# Altium PCB Board.PcbDoc (part 2 of 3)
Units mm, origin at the board's own origin, x right, y up, seen from the top; angles counter-clockwise.
Board outline 220 x 125 mm, 2 copper layers (Top Layer, Bottom Layer); 325 components, 197 nets, 1030 pads, 170 vias.
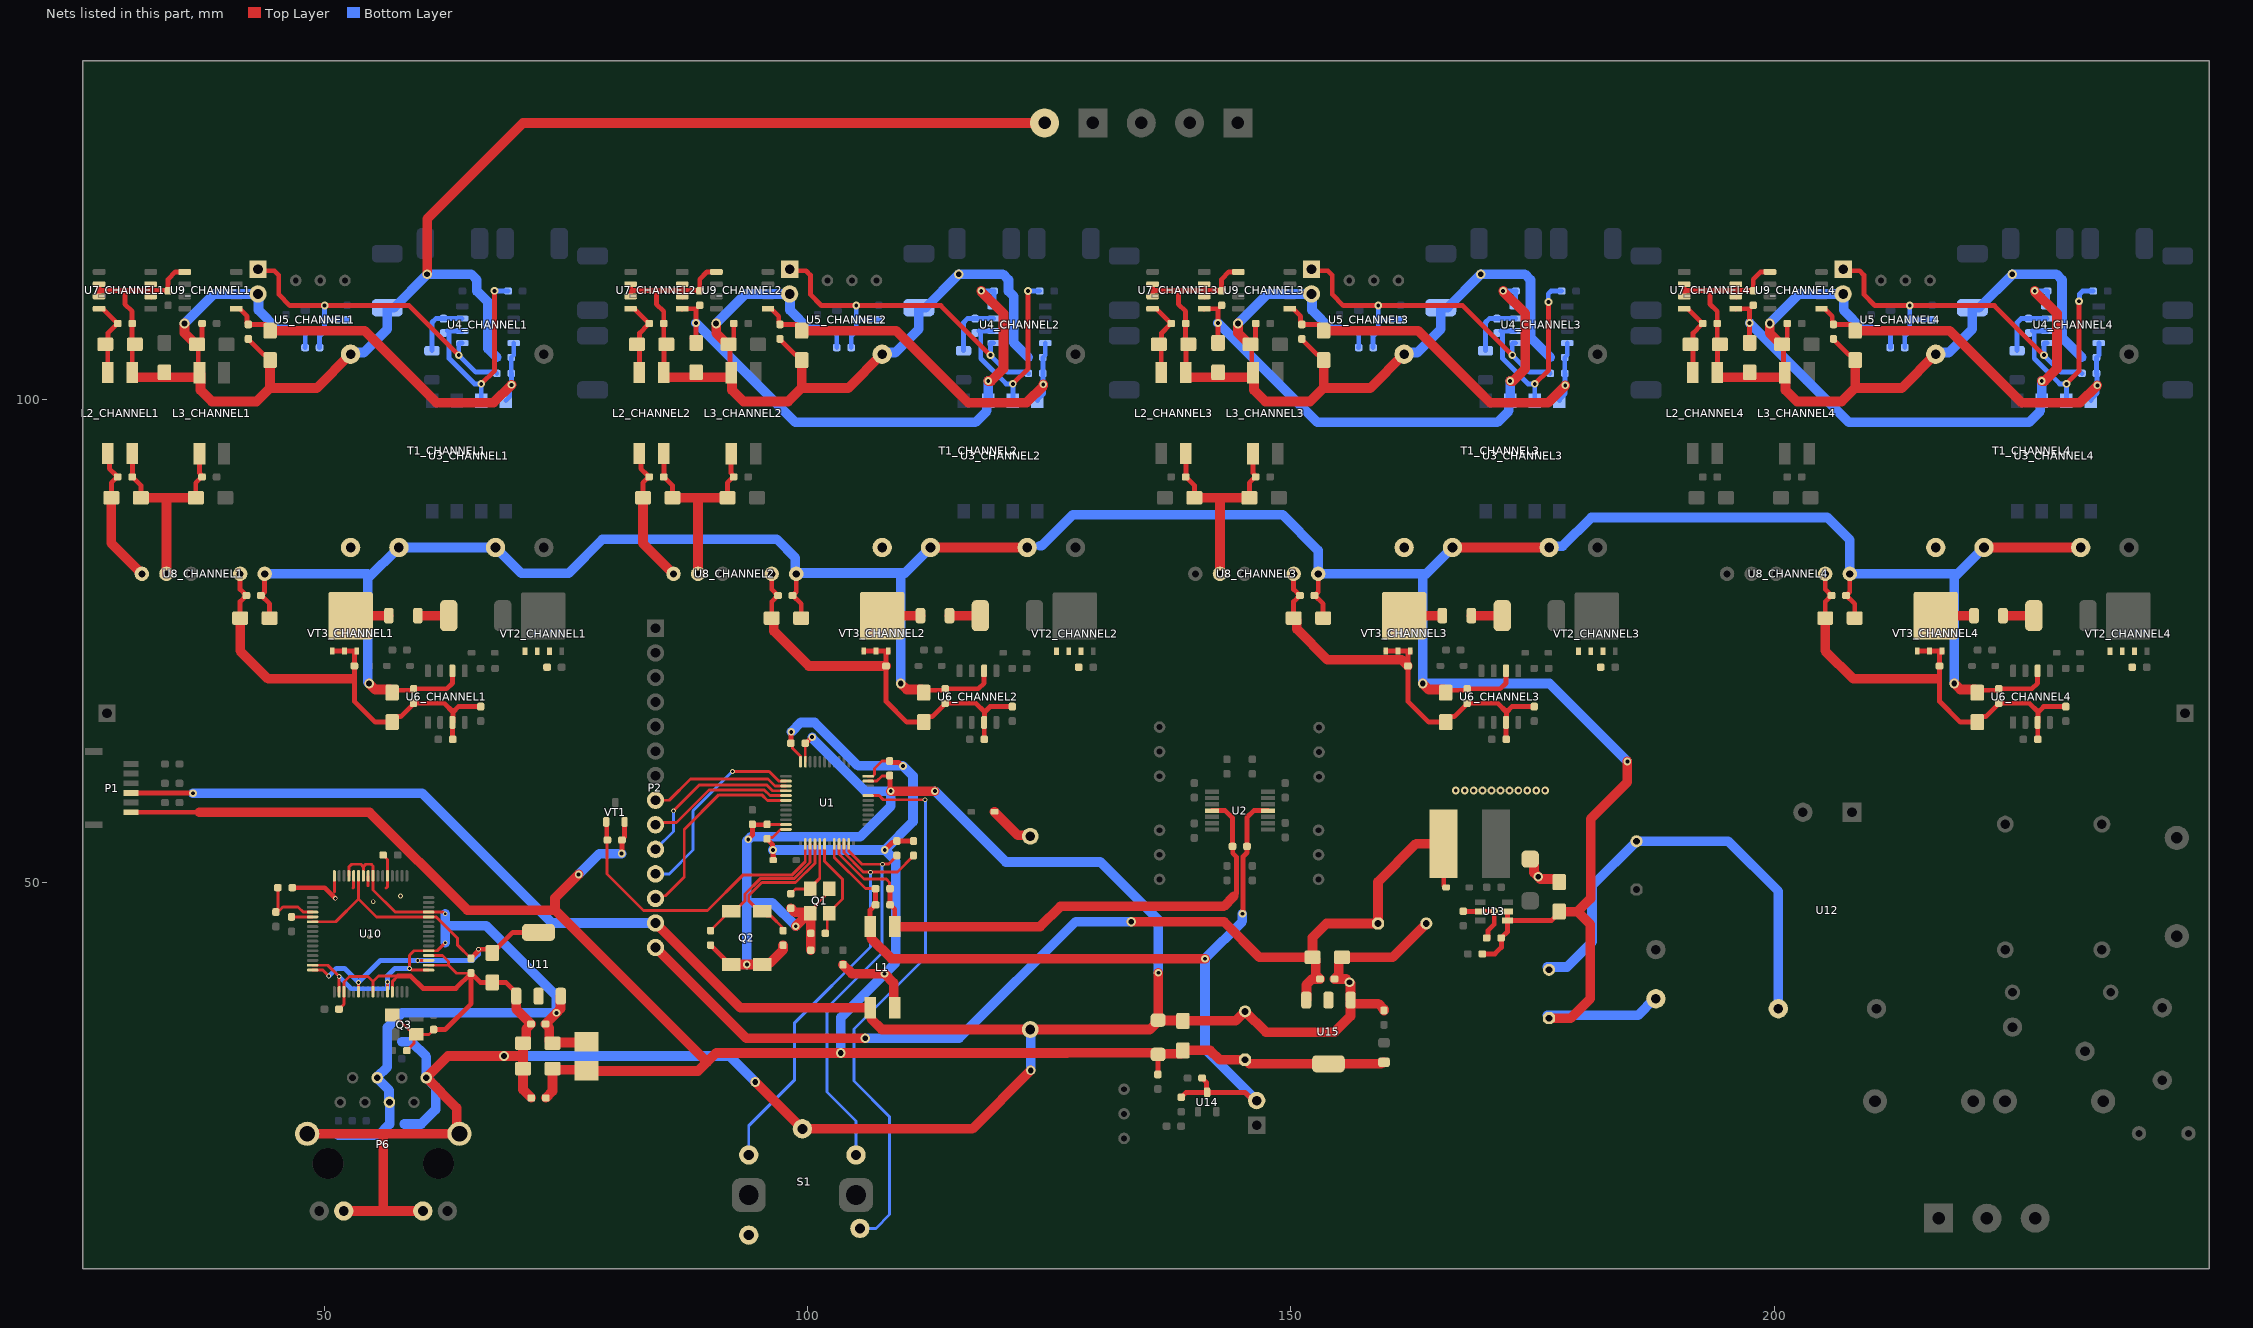
[diagram p2: the nets of this part, all layers, seen from the top]

## Via types
v1: diameter 0.8, hole 0.4, Top Layer to Bottom Layer, 99 vias
v2: diameter 0.5, hole 0.3, Top Layer to Bottom Layer, 49 vias
v3: diameter 1, hole 0.6, Top Layer to Bottom Layer, 22 vias

## Nets (pads, with @x,y where several pads share a name; then routed paths per layer and width w, separated by ;. In a path a pad name is that pad's centre, name@x,y a point inside that pad or via, vN(x,y) a via of type N, cw(c..) or ccw(c..) an arc to the next point about the centre after c; other vN are vias at no path point) (continued)
(+8V)_CHANNEL2: C13_CHANNEL2.2 C22_CHANNEL2.2 C23_CHANNEL2.1 U3_CHANNEL2.2 U4_CHANNEL2.8 U7_CHANNEL2.1 | length 57.7
  Top Layer w0.5: U7_CHANNEL2.1@87.01,109.337 U7_CHANNEL2.1@87.02,109.347 88.497,109.347 88.45,109.3 v1(88.45,107.875) C23_CHANNEL2.1@88.45,105.825 C23_CHANNEL2.1@88.021,106.254
  Top Layer w1: v1(117.95,111.2) 117.95,111.15 120.25,108.85 120.25,103.15 118.975,101.875 v1(118.675,101.875)
  Bottom Layer w0.5: v1(117.95,111.2) 117.964,111.186 119.26,111.186 C13_CHANNEL2.2@119.274,111.172 119.262,111.16 119.262,109.609 U4_CHANNEL2.8@119.25,109.597
  Bottom Layer w1: v1(88.45,107.875) 98.725,97.6 117.35,97.6 118.535,98.785 118.535,99.689 U3_CHANNEL2.2@118.685,99.839 118.685,101.865 v1(118.675,101.875)
(+8V)_CHANNEL3: C13_CHANNEL3.2 C22_CHANNEL3.2 C23_CHANNEL3.1 U3_CHANNEL3.2 U4_CHANNEL3.8 U7_CHANNEL3.1 | length 57.7
  Top Layer w0.5: U7_CHANNEL3.1@141.01,109.337 U7_CHANNEL3.1@141.02,109.347 142.497,109.347 142.45,109.3 v1(142.45,107.875) C23_CHANNEL3.1@142.45,105.825 C23_CHANNEL3.1@142.021,106.254
  Top Layer w1: v1(171.95,111.2) 171.95,111.15 174.25,108.85 174.25,103.15 172.975,101.875 v1(172.675,101.875)
  Bottom Layer w0.5: v1(171.95,111.2) 171.964,111.186 173.26,111.186 C13_CHANNEL3.2@173.274,111.172 173.262,111.16 173.262,109.609 U4_CHANNEL3.8@173.25,109.597
  Bottom Layer w1: v1(142.45,107.875) 152.725,97.6 171.35,97.6 172.535,98.785 172.535,99.689 U3_CHANNEL3.2@172.685,99.839 172.685,101.865 v1(172.675,101.875)
(+8V)_CHANNEL4: C13_CHANNEL4.2 C22_CHANNEL4.2 C23_CHANNEL4.1 U3_CHANNEL4.2 U4_CHANNEL4.8 U7_CHANNEL4.1 | length 57.7
  Top Layer w0.5: U7_CHANNEL4.1@196.01,109.337 U7_CHANNEL4.1@196.02,109.347 197.497,109.347 197.45,109.3 v1(197.45,107.875) C23_CHANNEL4.1@197.45,105.825 C23_CHANNEL4.1@197.021,106.254
  Top Layer w1: v1(226.95,111.2) 226.95,111.15 229.25,108.85 229.25,103.15 227.975,101.875 v1(227.675,101.875)
  Bottom Layer w0.5: v1(226.95,111.2) 226.964,111.186 228.26,111.186 C13_CHANNEL4.2@228.274,111.172 228.262,111.16 228.262,109.609 U4_CHANNEL4.8@228.25,109.597
  Bottom Layer w1: v1(197.45,107.875) 207.725,97.6 226.35,97.6 227.535,98.785 227.535,99.689 U3_CHANNEL4.2@227.685,99.839 227.685,101.865 v1(227.675,101.875)
(-8V)_CHANNEL1: C14_CHANNEL1.1 C32_CHANNEL1.1 C33_CHANNEL1.2 R22_CHANNEL1.2 U3_CHANNEL1.4 U4_CHANNEL1.4 U9_CHANNEL1.1 | length 39.7
  Top Layer w0.5: U9_CHANNEL1.1@40.886,109.347 41.216,109.347 42,108.563 42,107.85 C32_CHANNEL1.1@42.125,107.725 43.85,107.725 44.375,107.2 C33_CHANNEL1.2@44.375,107.075
  Top Layer w1: C33_CHANNEL1.2@44.375,107.075 54.15,107.075 61.6,99.625 67.5,99.625 v1(69.35,101.475)
  Bottom Layer w0.5: U3_CHANNEL1.4@68.765,99.839 69.165,100.239 69.165,101.209 69.35,101.394 v1(69.35,101.475) 69.34,101.485 69.34,102.653 R22_CHANNEL1.2@69.33,102.663 C14_CHANNEL1.1@69.33,104.314 ; C14_CHANNEL1.1@69.584,104.543 U4_CHANNEL1.4@69.584,105.787
(-8V)_CHANNEL2: C14_CHANNEL2.1 C32_CHANNEL2.1 C33_CHANNEL2.2 R22_CHANNEL2.2 U3_CHANNEL2.4 U4_CHANNEL2.4 U9_CHANNEL2.1 | length 39.9
  Top Layer w0.5: U9_CHANNEL2.1@95.886,109.347 96.216,109.347 97,108.563 97,107.85 C32_CHANNEL2.1@97.125,107.725 98.85,107.725 99.375,107.2 C33_CHANNEL2.2@99.375,107.075
  Top Layer w1: C33_CHANNEL2.2@99.375,107.075 109.15,107.075 116.6,99.625 122.63,99.625 124.375,101.37 v1(124.375,101.525)
  Bottom Layer w0.5: U3_CHANNEL2.4@123.765,99.839 123.765,99.939 124.4,100.574 124.4,100.85 124.412,100.862 124.412,101.488 124.353,101.547 124.353,102.641 R22_CHANNEL2.2@124.33,102.663 C14_CHANNEL2.1@124.33,104.314 ; C14_CHANNEL2.1@124.584,104.543 U4_CHANNEL2.4@124.584,105.787
(-8V)_CHANNEL3: C14_CHANNEL3.1 C32_CHANNEL3.1 C33_CHANNEL3.2 R22_CHANNEL3.2 U3_CHANNEL3.4 U4_CHANNEL3.4 U9_CHANNEL3.1 | length 39.8
  Top Layer w0.5: U9_CHANNEL3.1@149.886,109.347 150.216,109.347 151,108.563 151,107.85 C32_CHANNEL3.1@151.125,107.725 152.85,107.725 153.375,107.2 C33_CHANNEL3.2@153.375,107.075
  Top Layer w1: C33_CHANNEL3.2@153.375,107.075 163.15,107.075 170.6,99.625 176.63,99.625 178.375,101.37 v1(178.375,101.425)
  Bottom Layer w0.5: U3_CHANNEL3.4@177.765,99.839 177.765,99.939 178.375,100.549 v1(178.375,101.425) 178.353,101.447 178.353,102.641 R22_CHANNEL3.2@178.33,102.663 C14_CHANNEL3.1@178.33,104.314 ; C14_CHANNEL3.1@178.584,104.543 U4_CHANNEL3.4@178.584,105.787
(-8V)_CHANNEL4: C14_CHANNEL4.1 C32_CHANNEL4.1 C33_CHANNEL4.2 R22_CHANNEL4.2 U3_CHANNEL4.4 U4_CHANNEL4.4 U9_CHANNEL4.1 | length 39.8
  Top Layer w0.5: U9_CHANNEL4.1@204.886,109.347 205.216,109.347 206,108.563 206,107.85 C32_CHANNEL4.1@206.125,107.725 207.85,107.725 208.375,107.2 C33_CHANNEL4.2@208.375,107.075
  Top Layer w1: C33_CHANNEL4.2@208.375,107.075 218.15,107.075 225.6,99.625 231.63,99.625 233.425,101.42 v1(233.425,101.425)
  Bottom Layer w0.5: U3_CHANNEL4.4@232.765,99.839 232.765,99.939 233.425,100.599 v1(233.425,101.425) 233.378,101.472 233.378,102.616 R22_CHANNEL4.2@233.33,102.663 C14_CHANNEL4.1@233.33,104.314 ; C14_CHANNEL4.1@233.584,104.543 U4_CHANNEL4.4@233.584,105.787
(GND)_CHANNEL1: C13_CHANNEL1.1 C14_CHANNEL1.2 C16_CHANNEL1.2 C20_CHANNEL1.1 C21_CHANNEL1.2 C22_CHANNEL1.1 C23_CHANNEL1.2 C30_CHANNEL1.2 C31_CHANNEL1.1 C32_CHANNEL1.2 C33_CHANNEL1.1 L2_CHANNEL1.1 L3_CHANNEL1.2 P3_CHANNEL1.2 P5.2 R21_CHANNEL1.1 R34_CHANNEL1.1 T1_CHANNEL1.1 U5_CHANNEL1.1 U7_CHANNEL1.2 U7_CHANNEL1.3 U7_CHANNEL1.6 U7_CHANNEL1.7 U9_CHANNEL1.5 | length 182.6
  Top Layer w0.5: U7_CHANNEL1.7@26.686,110.617 26.686,111.252 ; U7_CHANNEL1.6@26.686,111.887 26.686,111.252 ; 29.353,111.252 32.02,111.252 ; L2_CHANNEL1.1@30.123,102.761 30.123,105.409 C21_CHANNEL1.2@30.378,105.664 ; C21_CHANNEL1.2@30.373,105.659 30.103,105.929 C20_CHANNEL1.1@30.103,107.823 30.103,109.072 29.35,109.825 29.35,111.252 26.686,111.252 ; U7_CHANNEL1.3@32.02,111.887 32.02,111.252 ; U7_CHANNEL1.2@32.075,110.562 U7_CHANNEL1.2@32.02,110.617 32.02,111.252 ; C22_CHANNEL1.1@33.682,111.252 32.02,111.252 ; C22_CHANNEL1.1@33.825,111.2 33.825,112.4 34.582,113.157 U9_CHANNEL1.5@35.552,113.157 ; C31_CHANNEL1.1@36.754,105.726 37.342,106.314 C30_CHANNEL1.2@37.342,107.823 ; C31_CHANNEL1.1@36.817,105.664 36.945,105.536 36.945,102.862 L3_CHANNEL1.2@37.059,102.748 ; C32_CHANNEL1.2@42.125,106.225 42.125,106.2 43.725,104.6 43.925,104.6 44.375,104.15 C33_CHANNEL1.1@44.375,104.025
  Top Layer w1: L2_CHANNEL1.1@30.123,102.761 30.123,102.375 30.223,102.275 36.972,102.275 37.072,102.375 L3_CHANNEL1.2@37.072,102.735 37.172,102.635 37.172,100.928 38.35,99.75 42.975,99.75 44.375,101.15 ; v3(35.525,107.825) 35.525,106.831 36.692,105.664 C31_CHANNEL1.1@36.817,105.664 ; C33_CHANNEL1.1@44.375,104.025 44.375,101.15 ; T1_CHANNEL1.1@52.705,104.648 49.207,101.15 44.375,101.15 ; v3(60.625,112.925) 60.625,118.65 70.546,128.571 P5.2@124.509,128.571
  Bottom Layer w0.5: R21_CHANNEL1.1@46.025,107.225 46.039,107.239 48.007,107.239 U5_CHANNEL1.1@48.011,107.243 ; C16_CHANNEL1.2@48,105.325 48.011,105.336 U5_CHANNEL1.1@48.011,107.243 ; U5_CHANNEL1.1@48.022,107.254 U5_CHANNEL1.1@48.011,107.243
  Bottom Layer w1: v3(35.525,107.825) 38.58,110.88 43.025,110.88 43.175,110.73 43.175,109.2 45.15,107.225 R21_CHANNEL1.1@46.025,107.225 ; T1_CHANNEL1.1@52.705,104.648 52.876,104.819 54.069,104.819 56.5,107.25 R34_CHANNEL1.1@56.5,109.45 57.2,109.45 60.625,112.875 v3(60.625,112.925) 65.188,112.925 65.774,112.339 C13_CHANNEL1.1@65.774,111.172 66.925,110.021 66.925,105.219 C14_CHANNEL1.2@67.83,104.314
(GND)_CHANNEL2: C13_CHANNEL2.1 C14_CHANNEL2.2 C16_CHANNEL2.2 C20_CHANNEL2.1 C21_CHANNEL2.2 C22_CHANNEL2.1 C23_CHANNEL2.2 C30_CHANNEL2.2 C31_CHANNEL2.1 C32_CHANNEL2.2 C33_CHANNEL2.1 L2_CHANNEL2.1 L3_CHANNEL2.2 P3_CHANNEL2.2 R21_CHANNEL2.1 R34_CHANNEL2.1 T1_CHANNEL2.1 U5_CHANNEL2.1 U7_CHANNEL2.2 U7_CHANNEL2.3 U7_CHANNEL2.6 U7_CHANNEL2.7 U9_CHANNEL2.5 | length 108.8
  Top Layer w0.5: U7_CHANNEL2.7@81.686,110.617 81.686,111.252 ; U7_CHANNEL2.6@81.686,111.887 81.686,111.252 ; 84.353,111.252 87.02,111.252 ; L2_CHANNEL2.1@85.123,102.761 85.123,105.409 C21_CHANNEL2.2@85.378,105.664 ; C21_CHANNEL2.2@85.373,105.659 85.103,105.929 C20_CHANNEL2.1@85.103,107.823 85.103,109.072 84.35,109.825 84.35,111.252 81.686,111.252 ; U7_CHANNEL2.3@87.02,111.887 87.02,111.252 ; U7_CHANNEL2.2@87.075,110.562 U7_CHANNEL2.2@87.02,110.617 87.02,111.252 ; C22_CHANNEL2.1@88.682,111.252 87.02,111.252 ; C22_CHANNEL2.1@88.825,111.2 88.825,112.4 89.582,113.157 U9_CHANNEL2.5@90.552,113.157 ; C31_CHANNEL2.1@91.754,105.726 92.342,106.314 C30_CHANNEL2.2@92.342,107.823 ; C31_CHANNEL2.1@91.817,105.664 91.944,105.536 91.944,102.862 L3_CHANNEL2.2@92.059,102.748 ; C32_CHANNEL2.2@97.125,106.225 97.125,106.2 98.725,104.6 98.925,104.6 99.375,104.15 C33_CHANNEL2.1@99.375,104.025
  Top Layer w1: L2_CHANNEL2.1@85.123,102.761 85.123,102.375 85.223,102.275 91.972,102.275 92.072,102.375 L3_CHANNEL2.2@92.072,102.735 92.172,102.635 92.172,100.928 93.35,99.75 97.975,99.75 99.375,101.15 ; v3(90.525,107.825) 90.525,106.831 91.692,105.664 C31_CHANNEL2.1@91.817,105.664 ; C33_CHANNEL2.1@99.375,104.025 99.375,101.15 ; T1_CHANNEL2.1@107.705,104.648 104.207,101.15 99.375,101.15
  Bottom Layer w0.5: R21_CHANNEL2.1@101.025,107.225 101.039,107.239 103.007,107.239 U5_CHANNEL2.1@103.011,107.243 ; C16_CHANNEL2.2@103,105.325 103.011,105.336 U5_CHANNEL2.1@103.011,107.243 ; U5_CHANNEL2.1@103.022,107.254 U5_CHANNEL2.1@103.011,107.243
  Bottom Layer w1: v3(90.525,107.825) 93.58,110.88 98.025,110.88 98.175,110.73 98.175,109.2 100.15,107.225 R21_CHANNEL2.1@101.025,107.225 ; T1_CHANNEL2.1@107.705,104.648 107.876,104.819 109.069,104.819 111.5,107.25 R34_CHANNEL2.1@111.5,109.45 112.2,109.45 115.625,112.875 v3(115.625,112.925) 120.188,112.925 120.774,112.339 C13_CHANNEL2.1@120.774,111.172 121.3,110.646 121.3,105.844 C14_CHANNEL2.2@122.83,104.314
(GND)_CHANNEL3: C13_CHANNEL3.1 C14_CHANNEL3.2 C16_CHANNEL3.2 C20_CHANNEL3.1 C21_CHANNEL3.2 C22_CHANNEL3.1 C23_CHANNEL3.2 C30_CHANNEL3.2 C31_CHANNEL3.1 C32_CHANNEL3.2 C33_CHANNEL3.1 L2_CHANNEL3.1 L3_CHANNEL3.2 P3_CHANNEL3.2 R21_CHANNEL3.1 R34_CHANNEL3.1 T1_CHANNEL3.1 U5_CHANNEL3.1 U7_CHANNEL3.2 U7_CHANNEL3.3 U7_CHANNEL3.6 U7_CHANNEL3.7 U9_CHANNEL3.5 | length 108.8
  Top Layer w0.5: U7_CHANNEL3.7@135.686,110.617 135.686,111.252 ; U7_CHANNEL3.6@135.686,111.887 135.686,111.252 ; 138.353,111.252 141.02,111.252 ; L2_CHANNEL3.1@139.123,102.761 139.123,105.409 C21_CHANNEL3.2@139.378,105.664 ; C21_CHANNEL3.2@139.373,105.659 139.103,105.929 C20_CHANNEL3.1@139.103,107.823 139.103,109.072 138.35,109.825 138.35,111.252 135.686,111.252 ; U7_CHANNEL3.3@141.02,111.887 141.02,111.252 ; U7_CHANNEL3.2@141.075,110.562 U7_CHANNEL3.2@141.02,110.617 141.02,111.252 ; C22_CHANNEL3.1@142.682,111.252 141.02,111.252 ; C22_CHANNEL3.1@142.825,111.2 142.825,112.4 143.582,113.157 U9_CHANNEL3.5@144.552,113.157 ; C31_CHANNEL3.1@145.754,105.726 146.342,106.314 C30_CHANNEL3.2@146.342,107.823 ; C31_CHANNEL3.1@145.817,105.664 145.945,105.536 145.945,102.862 L3_CHANNEL3.2@146.059,102.748 ; C32_CHANNEL3.2@151.125,106.225 151.125,106.2 152.725,104.6 152.925,104.6 153.375,104.15 C33_CHANNEL3.1@153.375,104.025
  Top Layer w1: L2_CHANNEL3.1@139.123,102.761 139.123,102.375 139.223,102.275 145.972,102.275 146.072,102.375 L3_CHANNEL3.2@146.072,102.735 146.172,102.635 146.172,100.928 147.35,99.75 151.975,99.75 153.375,101.15 ; v3(144.525,107.825) 144.525,106.831 145.692,105.664 C31_CHANNEL3.1@145.817,105.664 ; C33_CHANNEL3.1@153.375,104.025 153.375,101.15 ; T1_CHANNEL3.1@161.705,104.648 158.207,101.15 153.375,101.15
  Bottom Layer w0.5: R21_CHANNEL3.1@155.025,107.225 155.039,107.239 157.007,107.239 U5_CHANNEL3.1@157.011,107.243 ; C16_CHANNEL3.2@157,105.325 157.011,105.336 U5_CHANNEL3.1@157.011,107.243 ; U5_CHANNEL3.1@157.022,107.254 U5_CHANNEL3.1@157.011,107.243
  Bottom Layer w1: v3(144.525,107.825) 147.58,110.88 152.025,110.88 152.175,110.73 152.175,109.2 154.15,107.225 R21_CHANNEL3.1@155.025,107.225 ; T1_CHANNEL3.1@161.705,104.648 161.876,104.819 163.069,104.819 165.5,107.25 R34_CHANNEL3.1@165.5,109.45 166.2,109.45 169.625,112.875 v3(169.625,112.925) 174.188,112.925 174.774,112.339 174.774,106.37 C14_CHANNEL3.2@176.83,104.314
(GND)_CHANNEL4: C13_CHANNEL4.1 C14_CHANNEL4.2 C16_CHANNEL4.2 C20_CHANNEL4.1 C21_CHANNEL4.2 C22_CHANNEL4.1 C23_CHANNEL4.2 C30_CHANNEL4.2 C31_CHANNEL4.1 C32_CHANNEL4.2 C33_CHANNEL4.1 L2_CHANNEL4.1 L3_CHANNEL4.2 P3_CHANNEL4.2 R21_CHANNEL4.1 R34_CHANNEL4.1 T1_CHANNEL4.1 U5_CHANNEL4.1 U7_CHANNEL4.2 U7_CHANNEL4.3 U7_CHANNEL4.6 U7_CHANNEL4.7 U9_CHANNEL4.5 | length 108.8
  Top Layer w0.5: U7_CHANNEL4.7@190.686,110.617 190.686,111.252 ; U7_CHANNEL4.6@190.686,111.887 190.686,111.252 ; 193.353,111.252 196.02,111.252 ; L2_CHANNEL4.1@194.123,102.761 194.123,105.409 C21_CHANNEL4.2@194.378,105.664 ; C21_CHANNEL4.2@194.373,105.659 194.103,105.929 C20_CHANNEL4.1@194.103,107.823 194.103,109.072 193.35,109.825 193.35,111.252 190.686,111.252 ; U7_CHANNEL4.3@196.02,111.887 196.02,111.252 ; U7_CHANNEL4.2@196.075,110.562 U7_CHANNEL4.2@196.02,110.617 196.02,111.252 ; C22_CHANNEL4.1@197.682,111.252 196.02,111.252 ; C22_CHANNEL4.1@197.825,111.2 197.825,112.4 198.582,113.157 U9_CHANNEL4.5@199.552,113.157 ; C31_CHANNEL4.1@200.754,105.726 201.342,106.314 C30_CHANNEL4.2@201.342,107.823 ; C31_CHANNEL4.1@200.817,105.664 200.945,105.536 200.945,102.862 L3_CHANNEL4.2@201.059,102.748 ; C32_CHANNEL4.2@206.125,106.225 206.125,106.2 207.725,104.6 207.925,104.6 208.375,104.15 C33_CHANNEL4.1@208.375,104.025
  Top Layer w1: L2_CHANNEL4.1@194.123,102.761 194.123,102.375 194.223,102.275 200.972,102.275 201.072,102.375 L3_CHANNEL4.2@201.072,102.735 201.172,102.635 201.172,100.928 202.35,99.75 206.975,99.75 208.375,101.15 ; v3(199.525,107.825) 199.525,106.831 200.692,105.664 C31_CHANNEL4.1@200.817,105.664 ; C33_CHANNEL4.1@208.375,104.025 208.375,101.15 ; T1_CHANNEL4.1@216.705,104.648 213.207,101.15 208.375,101.15
  Bottom Layer w0.5: R21_CHANNEL4.1@210.025,107.225 210.039,107.239 212.007,107.239 U5_CHANNEL4.1@212.011,107.243 ; C16_CHANNEL4.2@212,105.325 212.011,105.336 U5_CHANNEL4.1@212.011,107.243 ; U5_CHANNEL4.1@212.022,107.254 U5_CHANNEL4.1@212.011,107.243
  Bottom Layer w1: v3(199.525,107.825) 202.58,110.88 207.025,110.88 207.175,110.73 207.175,109.2 209.15,107.225 R21_CHANNEL4.1@210.025,107.225 ; T1_CHANNEL4.1@216.705,104.648 216.876,104.819 218.069,104.819 220.5,107.25 R34_CHANNEL4.1@220.5,109.45 221.2,109.45 224.625,112.875 v3(224.625,112.925) 229.188,112.925 229.774,112.339 229.774,106.37 C14_CHANNEL4.2@231.83,104.314
+1.8_Eth: C43.2 C56.1 U10.6 U10.19 U10.28 U10.43 U10.54 U10.64 U11.2 U11.4 | length 53.5
  Top Layer w0.3: U10.64@48.775,40.925 49.825,40.925 v2(50.45,40.3) ; U10.54@48.775,45.925 51.175,45.925 53.525,48.275 ; U10.6@53.525,38.675 v2(53.525,39.65) ; U10.43@53.525,50.675 53.525,48.275 ; v2(59.65,41.925) U10.19@60.775,41.925 ; C43.2@65.175,42.15 C43.2@65.175,42.125 63.75,43.55 63.75,44.25 61.575,46.425 U10.28@60.775,46.425 55.375,46.425 53.525,48.275
  Top Layer w0.5: C43.2@65.175,42.15 65.925,42.9 v2(65.925,43.075) 67,43.075 C56.1@67.375,42.7 67.375,42.825 67.825,43.275 67.95,43.275 69.5,44.825 U11.4@72.15,44.825
  Bottom Layer w0.5: v2(50.45,40.3) 51.25,41.1 52.075,41.1 v2(53.525,39.65) 55.8,41.925 v2(59.65,41.925) 65.307,41.925 65.925,42.543 v2(65.925,43.075)
+3.3_Bat: B1.1 VD2.1 | length 4.7
  Top Layer w1: VD2.1@119.325,57.3 121.758,54.867 122.933,54.867 B1.1@123.025,54.775
+3.3_Eth: C34.2 C35.2 C41.1 C42.2 L4.2 P6.4 P6.5 R35.2 R36.2 R37.2 R38.2 U10.2 U10.12 U10.17 U10.21 U10.29 U10.40 U10.42 U10.45 U10.63 U11.3 | length 102.2
  Top Layer w0.3: U10.63@48.775,41.425 50.35,41.425 v2(51.525,40.25) U10.2@51.525,38.675 ; U10.45@52.525,50.675 52.525,51.575 52.825,51.875 53.774,51.875 54.025,51.624 ; U10.42@54.025,50.675 54.025,51.624 ; U10.12@56.525,38.675 v2(56.525,39.675) ; U10.17@60.775,40.925 59.029,40.925 58.854,41.1 v2(58.8,41.1) 58.8,42.45 59.275,42.925 U10.21@60.775,42.925 61.675,42.925 v2(62.5,43.75) ; v2(62.5,46.75) 62.446,46.75 62.271,46.925 U10.29@60.775,46.925 57.325,46.925 55.025,49.225 U10.40@55.025,50.675 55.025,51.699 54.849,51.875 54.276,51.875 54.025,51.624
  Top Layer w1: C42.2@72.875,35.35 73.275,34.95 73.275,33.55 73.475,33.35 C41.1@73.6,33.35 73.675,33.425 77.05,33.425 L4.2@77.125,33.5 ; C42.2@72.925,35.4 v1@74.012,36.488 ; v1(74,36.5) 74.425,36.925 74.425,38.2 U11.3@74.475,38.25
  Bottom Layer w0.5: v2(51.525,40.25) 52.775,39 56.525,39 v2(56.525,39.675) 56.525,40.325 57.3,41.1 v2(58.8,41.1)
  Bottom Layer w1: R38.2@51.45,23.825 R37.2@52.883,23.825 R36.2@54.317,23.825 55.575,23.825 C34.2@56.75,25 56.75,27.225 P6.5@56.725,27.25 56.687,27.288 56.687,28.504 55.455,29.736 P6.4@55.455,29.79 55.455,29.844 56.5,30.889 R35.2@56.5,31.75 56.5,35 58,36.5 v1(74,36.5) 74,38.25 66.75,45.5 62.5,45.5 ; v2(62.5,43.75) 62.5,45.5 ; v2(62.5,46.75) 62.5,45.5
+3.3V: C39.1 C40.2 C57.1 C58.1 C59.2 C60.2 C61.2 L1.2 L4.1 P1.6 R1.2 R2.2 R10.2 R16.2 R44.2 U1.24 U1.36 U1.48 U15.2 U15.4 VD1.1 VD7.1 VD8.2 VT1.2 | length 260.2
  Top Layer w0.3: C59.2@95.8,54.5 95.938,54.638 96.363,54.638 97.2,55.475 U1.48@97.75,55.475 ; C60.2@98.25,64.4 98.426,64.224 98.426,63.874 99.25,63.05 U1.36@99.25,62.475 ; U1.24@106.25,60.975 106.749,60.975 106.925,61.151 106.925,61.775 107.7,62.55 C61.2@108.475,62.55 C61.2@108.475,62.525
  Top Layer w0.5: P1.6@30,57.25 37.075,57.25 ; v1(80.75,52.975) 80.775,53 R16.2@80.775,54.375 ; R16.2@81.05,54.668 VT1.2@81.05,56.25 ; C59.2@95.8,54.5 95.925,54.375 95.925,54.35 96.343,53.932 96.343,53.407 v1(96.4,53.35) ; v1@96.425,53.525 96.425,52.725 96.45,52.7 ; C60.2@98.25,64.4 98.275,64.425 98.275,65.55 v1(98.3,65.575) ; v1(107.975,53.35) 108.75,54.125 109.1,54.125 109.225,54.25 R1.2@109.225,54.275 R2.2@110.95,54.275 ; C61.2@108.475,62.525 108.6,62.4 109.419,62.4 109.769,62.05 v1(109.85,62.05) ; R44.2@136.238,30.137 VD8.2@136.238,32.185
  Top Layer w1: 37.075,57.25 54.664,57.25 64.789,47.125 73.85,47.125 ; C40.2@72.9,27.7 73.6,28.4 C39.1@73.6,30.725 73.712,30.612 77.013,30.612 L4.1@77.125,30.5 77.15,30.475 88.65,30.475 90.525,32.35 v3(103.425,32.35) 126.85,32.35 126.875,32.375 136.072,32.375 VD8.2@136.25,32.197 ; v1(76.3,50.825) 73.85,48.375 73.85,47.125 ; 89.575,31.4 73.85,47.125 ; R10.2@103.65,41.475 104.575,40.55 v1(107.95,40.55) 108.9,39.6 108.9,37.125 L1.2@109,37.025 ; VD8.2@136.512,32.275 138.475,32.275 138.5,32.3 138.625,32.3 138.825,32.5 C58.1@138.825,32.625 141.64,32.625 142.615,31.65 C57.1@145.25,31.65 ; C57.1@145.695,31.225 U15.4@153.875,31.225 159.35,31.225 159.525,31.4 VD7.1@159.625,31.4
  Bottom Layer w1: v1(76.3,50.825) 78.45,52.975 v1(80.75,52.975) ; v1(96.4,53.35) v1(107.975,53.35) ; v1(98.3,65.575) 99.273,66.548 100.727,66.548 105.225,62.05 v1(109.85,62.05) 110.9,61 110.9,56.275 v1(107.975,53.35) ; v3(103.425,32.35) 103.425,36.025 109.125,41.725 109.125,52.2 v1(107.975,53.35)
+5V: C52.1 C53.1 C54.1 L7.2 P2.14 U15.3 VD5.1 | length 111.1
  Top Layer w0.5: L7.2@165.8,54 165.8,49.625 165.95,49.475 VD5.1@166.05,49.475
  Top Layer w1: P2.14@84.25,43.26 93.635,33.875 v3(105.95,33.875) ; v3(133.475,45.925) 143.075,45.925 146.75,42.25 C53.1@152.225,42.25 ; U15.3@151.575,37.825 151.6,37.85 151.6,39.414 152.186,40 152.55,40 C54.1@153,40 152.55,40.45 152.55,42.05 152.35,42.25 C53.1@152.225,42.25 ; L7.2@165.8,54 162.95,54 159,50.05 C52.1@159,45.75 153.675,45.75 152.225,44.3 C53.1@152.225,42.25
  Bottom Layer w1: v3(105.95,33.875) 115.675,33.875 127.725,45.925 v3(133.475,45.925)
+12V: C17_CHANNEL1.1 C17_CHANNEL2.1 C17_CHANNEL3.1 C17_CHANNEL4.1 C18_CHANNEL1.1 C18_CHANNEL2.1 C18_CHANNEL3.1 C18_CHANNEL4.1 C26_CHANNEL1.1 C26_CHANNEL2.1 C26_CHANNEL3.1 C26_CHANNEL4.1 C27_CHANNEL1.2 C27_CHANNEL2.2 C27_CHANNEL3.2 C27_CHANNEL4.2 C46.1 C47.1 C55.1 L5.2 R46.2 T1_CHANNEL1.7 T1_CHANNEL1.9 T1_CHANNEL2.7 T1_CHANNEL2.9 T1_CHANNEL3.7 T1_CHANNEL3.9 T1_CHANNEL4.7 T1_CHANNEL4.9 U6_CHANNEL1.6 U6_CHANNEL2.6 U6_CHANNEL3.6 U6_CHANNEL4.6 U8_CHANNEL1.1 U8_CHANNEL2.1 U8_CHANNEL3.1 U8_CHANNEL4.1 U13.4 U13.5 | length 399.2
  Top Layer w0.5: C27_CHANNEL1.2@43.428,79.681 C27_CHANNEL1.2@43.453,79.681 ; U8_CHANNEL1.1@43.815,81.915 43.815,80.043 C27_CHANNEL1.2@43.453,79.681 ; C26_CHANNEL1.1@44.324,77.343 44.324,78.81 C27_CHANNEL1.2@43.453,79.681 ; C17_CHANNEL1.1@57,69.625 57.25,69.875 59.1,69.875 59.225,70 C18_CHANNEL1.1@59.225,70.025 62.65,70.025 63.246,70.621 U6_CHANNEL1.6@63.246,71.882 ; C27_CHANNEL2.2@98.428,79.681 C27_CHANNEL2.2@98.453,79.681 ; U8_CHANNEL2.1@98.815,81.915 98.815,80.043 C27_CHANNEL2.2@98.453,79.681 ; C26_CHANNEL2.1@99.324,77.343 99.324,78.81 C27_CHANNEL2.2@98.453,79.681 ; C17_CHANNEL2.1@112,69.625 112.25,69.875 114.1,69.875 114.225,70 C18_CHANNEL2.1@114.225,70.025 117.65,70.025 118.246,70.621 U6_CHANNEL2.6@118.246,71.882 ; C27_CHANNEL3.2@152.428,79.681 C27_CHANNEL3.2@152.453,79.681 ; U8_CHANNEL3.1@152.815,81.915 152.815,80.043 C27_CHANNEL3.2@152.453,79.681 ; C26_CHANNEL3.1@153.324,77.343 153.324,78.81 C27_CHANNEL3.2@152.453,79.681 ; C17_CHANNEL3.1@166,69.625 166.25,69.875 168.1,69.875 168.225,70 C18_CHANNEL3.1@168.225,70.025 171.65,70.025 172.246,70.621 U6_CHANNEL3.6@172.246,71.882 ; R46.2@169.8,42.6 171.1,42.6 171.775,43.275 171.775,44.25 172.4,44.875 U13.4@172.4,46.05 ; U13.5@172.4,47 U13.4@172.4,46.05 ; C47.1@177.75,46.85 176.95,46.05 U13.4@172.4,46.05 ; C27_CHANNEL4.2@207.428,79.681 C27_CHANNEL4.2@207.453,79.681 ; U8_CHANNEL4.1@207.815,81.915 207.815,80.043 C27_CHANNEL4.2@207.453,79.681 ; C26_CHANNEL4.1@208.324,77.343 208.324,78.81 C27_CHANNEL4.2@207.453,79.681 ; C17_CHANNEL4.1@221,69.625 221.25,69.875 223.1,69.875 223.225,70 C18_CHANNEL4.1@223.225,70.025 226.65,70.025 227.246,70.621 U6_CHANNEL4.6@227.246,71.882
  Top Layer w1: v3(54.625,70.575) 55.25,69.95 56.8,69.95 C17_CHANNEL1.1@57,69.75 ; v3(109.625,70.575) 110.25,69.95 111.8,69.95 112,69.75 C17_CHANNEL2.1@112,69.625 ; T1_CHANNEL2.9@112.705,84.648 T1_CHANNEL2.7@122.705,84.648 ; v3(163.625,70.575) 164.25,69.95 165.8,69.95 166,69.75 C17_CHANNEL3.1@166,69.625 ; T1_CHANNEL3.9@166.705,84.648 T1_CHANNEL3.7@176.705,84.648 ; C46.1@176.7,35.95 178.95,35.95 180.975,37.975 180.975,45.65 179.65,46.975 ; C47.1@177.75,46.975 179.65,46.975 ; v1(184.8,62.5) 184.8,60.375 181,56.575 181,48.325 179.65,46.975 ; v3(218.625,70.575) 219.25,69.95 220.8,69.95 221,69.75 C17_CHANNEL4.1@221,69.625 ; T1_CHANNEL4.9@221.705,84.648 T1_CHANNEL4.7@231.705,84.648
  Bottom Layer w1: U8_CHANNEL1.1@43.815,81.915 54.475,81.915 54.475,81.418 ; v3(54.625,70.575) 54.475,70.725 54.475,81.418 ; v3(109.625,70.575) 109.625,81.886 109.5,82.011 ; T1_CHANNEL2.9@112.705,84.648 110.068,82.011 109.5,82.011 ; 124,84.825 124.2,84.825 127.425,88.05 149.125,88.05 152.815,84.36 U8_CHANNEL3.1@152.815,81.915 163.972,81.915 ; T1_CHANNEL3.9@166.705,84.648 163.972,81.915 ; C46.1@176.5,36.25 185.924,36.25 187.634,37.96 L5.2@187.75,37.96 ; T1_CHANNEL3.7@176.705,84.648 176.839,84.782 178.107,84.782 181.075,87.75 205.5,87.75 207.815,85.435 U8_CHANNEL4.1@207.815,81.915 218.972,81.915 ; v1(184.8,62.5) 184.8,62.525 176.75,70.575 v3(163.625,70.575) 163.625,81.568 163.972,81.915 ; v3(218.625,70.575) 218.625,81.568 218.972,81.915 ; T1_CHANNEL4.9@221.705,84.648 218.972,81.915 ; 54.475,81.418 T1_CHANNEL1.9@57.705,84.648 T1_CHANNEL1.7@67.705,84.648 70.378,81.975 75.25,81.975 78.775,85.5 96.8,85.5 98.719,83.581 98.719,82.011 109.5,82.011
ACT: R41.1 R42.2 U10.52 | length 6.7
  Top Layer w0.3: R42.2@45.175,49.45 45.175,46.93 45.175,47.13 45.197,47.152 45.397,47.152 45.695,47.45 47.275,47.45 47.8,46.925 U10.52@48.775,46.925
AGND: C3.1 C11.1 C12.1 C51.1 L1.4 P8.2 R49.1 U1.8 U2.11 U14.3 | length 93.7
  Top Layer w0.3: U1.8@102.75,53.975 102.75,52.575 105.975,49.35 C12.1@107.025,49.35
  Top Layer w0.5: L1.4@106.46,45.425 106.46,47.135 107,47.675 C11.1@107.025,47.675 C12.1@107.025,49.35 ; C51.1@138.65,27.775 138.65,27.8 138.775,27.925 138.8,27.925 139.15,28.275 U14.3@141.325,28.275 ; R49.1@140.8,29.75 140.825,29.75 141.25,29.325 141.25,28.35 U14.3@141.325,28.275 ; v1(144.975,46.75) 145.05,46.825 145.05,52.675 145.45,53.075 C3.1@145.45,53.725 145.45,56.725 146.15,57.425 U2.11@147.625,57.425 ; P8.2@146.45,27.42 146.098,27.42 145.243,28.275 U14.3@141.325,28.275
  Top Layer w1: L1.4@106.46,45.425 106.56,45.325 106.56,44.215 108.675,42.1 v1(141.1,42.1)
  Bottom Layer w1: v1(144.975,46.75) 144.975,45.975 v1(141.1,42.1) 141.1,32.77 P8.2@146.45,27.42
AVCC: C3.2 C11.2 C12.2 L1.3 U1.9 U2.4 | length 59.5
  Top Layer w0.3: U1.9@103.25,53.975 103.25,52.925 105.825,50.35 108.125,50.35 108.476,49.999 C12.2@108.476,49.399
  Top Layer w0.5: C12.2@108.476,49.399 C12.2@108.525,49.35 C11.2@108.525,47.675 108.55,47.675 109,47.225 L1.3@109,45.925 ; U2.4@141.825,57.425 143.2,57.425 143.95,56.675 C3.2@143.95,53.725 143.975,53.7 143.975,53.025 144.35,52.65 144.35,48.825 144.075,48.55
  Top Layer w1: L1.3@109,45.925 L1.3@109,45.425 124.05,45.425 126.15,47.525 143.05,47.525 144.075,48.55
ENC_A: R2.1 S1.A U1.10 | length 44.6
  Top Layer w0.3: U1.10@103.75,54.425 103.75,53.075 105.75,51.075 109.275,51.075 110.95,52.75 R2.1@110.95,52.775
  Bottom Layer w0.3: S1.A@93.9,21.8 93.9,24.825 98.65,29.575 98.65,35.475 106.5,43.325 v2(106.5,51.05)
ENC_B: R1.1 S1.B U1.11 | length 40.3
  Top Layer w0.3: U1.11@104.25,53.975 104.25,53.25 105.625,51.875 v2(107.725,51.875) 107.763,51.913 108.388,51.913 109.225,52.75 R1.1@109.225,52.775
  Bottom Layer w0.3: S1.B@105,21.8 105,25.3 102,28.3 102,37 107.7,42.7 107.7,51.85 v2(107.725,51.875)
ENC_KEY: S1.D U1.20 | length 57.3
  Top Layer w0.3: U1.20@106.25,58.975 107.395,58.975 107.823,58.547 v2(112.141,58.547)
  Bottom Layer w0.3: S1.D@105.4,14.2 107.05,14.2 108.475,15.625 108.475,25.75 104.775,29.45 104.775,34.825 112.175,42.225 112.175,58.513 v2(112.141,58.547)
GND: B1.2 C5.2 C6.2 C7.2 C9.2 C10.1 C17_CHANNEL1.2 C17_CHANNEL2.2 C17_CHANNEL3.2 C17_CHANNEL4.2 C18_CHANNEL1.2 C18_CHANNEL2.2 C18_CHANNEL3.2 C18_CHANNEL4.2 C26_CHANNEL1.2 C26_CHANNEL2.2 C26_CHANNEL3.2 C26_CHANNEL4.2 C27_CHANNEL1.1 C27_CHANNEL2.1 C27_CHANNEL3.1 C27_CHANNEL4.1 C34.1 C35.1 C36.1 C37.1 C38.1 C39.2 C40.1 C41.2 C42.1 C43.1 C45.2 C46.2 C47.2 C52.2 C53.2 C54.2 C55.2 C56.2 C57.2 C58.2 C59.1 C60.1 C61.1 L1.1 P1.4 P2.13 P6.8 P6.10 P6.11 P6.13 Q1.2 Q1.4 Q2.2 Q2.3 Q3.2 Q3.4 R9.2 R25_CHANNEL1.1 R25_CHANNEL2.1 R25_CHANNEL3.1 R25_CHANNEL4.1 R27_CHANNEL1.2 R27_CHANNEL2.2 R27_CHANNEL3.2 R27_CHANNEL4.2 R32_CHANNEL1.1 R32_CHANNEL2.1 R32_CHANNEL3.1 R32_CHANNEL4.1 R33_CHANNEL1.2 R33_CHANNEL2.2 R33_CHANNEL3.2 R33_CHANNEL4.2 R40.2 R42.1 R48.1 R50.1 S1.C S1.E U1.23 U1.35 U1.47 U6_CHANNEL1.3 U6_CHANNEL2.3 U6_CHANNEL3.3 U6_CHANNEL4.3 U8_CHANNEL1.2 U8_CHANNEL2.2 U8_CHANNEL3.2 U8_CHANNEL4.2 U10.3 U10.9 U10.13 U10.18 U10.20 U10.37 U10.41 U10.44 U10.48 U11.1 U12.4 U13.2 U15.1 VD6.1 VD8.1 VT2_CHANNEL1.3 VT2_CHANNEL2.3 VT2_CHANNEL3.3 VT2_CHANNEL4.3 VT3_CHANNEL1.3 VT3_CHANNEL2.3 VT3_CHANNEL3.3 VT3_CHANNEL4.3 | length 730.3
  Top Layer w0.3: U10.48@51.025,50.675 51.025,49.051 51.054,49.022 ; R40.2@51.5,36.875 51.505,36.875 52.025,37.395 U10.3@52.025,38.675 52.025,39.7 52.6,40.275 54.5,40.275 55.025,39.75 ; 52.959,49.403 53.025,49.469 U10.44@53.025,50.675 ; 54.483,49.657 54.525,49.699 U10.41@54.525,50.675 ; U10.9@55.025,38.675 55.025,39.75 ; C36.1@56.075,52.825 56.08,52.825 56.525,52.38 U10.37@56.525,50.675 56.525,49.54 56.388,49.403 ; Q3.4@57,36.275 57.5,35.775 57.725,35.775 58.725,34.775 59,34.775 Q3.2@59.5,34.275 ; U10.13@57.025,38.675 57.025,39.725 57.625,40.325 55.6,40.325 55.025,39.75 ; C37.1@58.525,32.6 58.53,32.6 58.775,32.845 58.775,32.85 59.276,33.351 59.276,34.051 Q3.2@59.5,34.275 ; U10.18@60.775,41.425 62.825,41.425 ; U10.20@60.775,42.425 62.2,42.425 62.825,41.8 62.825,41.425 ; C38.1@61.3,34.775 61.3,34.77 60.805,34.275 Q3.2@59.5,34.275 ; C43.1@65.175,40.6 63.65,40.6 62.825,41.425 ; C59.1@95.8,56 95.825,55.975 U1.47@97.75,55.975 ; U1.35@99.75,62.475 C60.1@99.75,64.4 ; Q1.2@100.25,46.825 100.75,47.325 100.75,47.55 101.75,48.55 101.75,48.825 Q1.4@102.25,49.325 ; U1.23@106.25,60.475 107.15,60.475 107.675,61 108.425,61 C61.1@108.475,61.05
  Top Layer w0.5: P1.4@30,59.25 36.375,59.25 v1(36.4,59.225) ; C26_CHANNEL1.2@41.274,77.343 41.274,79.052 C27_CHANNEL1.1@41.903,79.681 ; U8_CHANNEL1.2@41.275,81.915 41.275,80.309 C27_CHANNEL1.1@41.903,79.681 ; C27_CHANNEL1.1@41.928,79.681 C27_CHANNEL1.1@41.903,79.681 ; R42.1@46.675,49.45 50.025,49.45 v2(51.125,48.35) ; VT3_CHANNEL1.3@50.8,73.947 VT3_CHANNEL1.3@52.07,73.947 VT3_CHANNEL1.3@53.34,73.947 53.34,73.822 53.098,73.58 R32_CHANNEL1.1@53.098,72.39 53.098,68.727 55.25,66.575 C17_CHANNEL1.2@57,66.575 57,66.7 57.45,67.15 57.875,67.15 59.225,68.5 C18_CHANNEL1.2@59.225,68.525 62.4,68.525 63.3,67.625 ; 57.625,40.325 58.9,40.325 60.2,39.025 63.6,39.025 C43.1@65.175,40.6 ; C38.1@61.3,34.775 62.5,34.775 65.175,37.45 C43.1@65.175,40.6 ; R33_CHANNEL1.2@63.275,64.8 63.261,64.815 63.261,66.533 U6_CHANNEL1.3@63.246,66.548 63.3,66.602 63.3,67.625 ; C43.1@65.175,40.625 C43.1@65.175,40.6 ; R27_CHANNEL1.2@66.167,68.187 63.862,68.187 63.3,67.625 ; U11.1@69.85,38.225 69.85,38.568 68.768,39.65 C56.2@67.375,39.65 66.125,39.65 C43.1@65.175,40.6 ; C9.2@89.95,43.475 Q2.3@91.4,42.025 ; v1(93.85,54.45) 93.85,54.456 94.275,54.881 R9.2@94.275,56 ; R9.2@94.313,55.962 95.763,55.962 C59.1@95.8,56 ; C26_CHANNEL2.2@96.274,77.343 96.274,79.052 C27_CHANNEL2.1@96.903,79.681 ; U8_CHANNEL2.2@96.275,81.915 96.275,80.309 C27_CHANNEL2.1@96.903,79.681 ; C27_CHANNEL2.1@96.928,79.681 C27_CHANNEL2.1@96.903,79.681 ; C60.1@99.75,64.4 99.775,64.4 100.399,65.024 v1(100.457,65.024) ; VT3_CHANNEL2.3@105.8,73.947 VT3_CHANNEL2.3@107.07,73.947 VT3_CHANNEL2.3@108.34,73.947 108.34,73.822 108.098,73.58 R32_CHANNEL2.1@108.098,72.39 108.098,68.727 110.25,66.575 C17_CHANNEL2.2@112,66.575 112,66.7 112.45,67.15 112.875,67.15 114.225,68.5 C18_CHANNEL2.2@114.225,68.525 117.4,68.525 118.3,67.625 ; C61.1@108.475,61.05 108.53,60.995 108.53,59.491 v1(108.585,59.436) ; R33_CHANNEL2.2@118.275,64.8 118.261,64.815 118.261,66.533 U6_CHANNEL2.3@118.246,66.548 118.3,66.602 118.3,67.625 ; R27_CHANNEL2.2@121.167,68.187 118.862,68.187 118.3,67.625 ; C26_CHANNEL3.2@150.274,77.343 150.274,79.052 C27_CHANNEL3.1@150.903,79.681 ; U8_CHANNEL3.2@150.275,81.915 150.275,80.309 C27_CHANNEL3.1@150.903,79.681 ; C27_CHANNEL3.1@150.928,79.681 C27_CHANNEL3.1@150.903,79.681 ; VT3_CHANNEL3.3@159.8,73.947 VT3_CHANNEL3.3@161.07,73.947 VT3_CHANNEL3.3@162.34,73.947 162.34,73.822 162.098,73.58 R32_CHANNEL3.1@162.098,72.39 162.098,68.727 164.25,66.575 C17_CHANNEL3.2@166,66.575 166,66.7 166.45,67.15 166.875,67.15 168.225,68.5 C18_CHANNEL3.2@168.225,68.525 171.4,68.525 172.3,67.625 ; R48.1@167.825,47 U13.2@169.6,47 169.612,47.012 171.013,47.012 v1(171.025,47.025) 171.025,45.65 170.4,45.025 C55.2@170.4,44.175 ; R33_CHANNEL3.2@172.275,64.8 172.261,64.815 172.261,66.533 U6_CHANNEL3.3@172.246,66.548 172.3,66.602 172.3,67.625 ; R27_CHANNEL3.2@175.167,68.187 172.862,68.187 172.3,67.625 ; C26_CHANNEL4.2@205.274,77.343 205.274,79.052 C27_CHANNEL4.1@205.903,79.681 ; U8_CHANNEL4.2@205.275,81.915 205.275,80.309 C27_CHANNEL4.1@205.903,79.681 ; C27_CHANNEL4.1@205.928,79.681 C27_CHANNEL4.1@205.903,79.681 ; VT3_CHANNEL4.3@214.8,73.947 VT3_CHANNEL4.3@216.07,73.947 VT3_CHANNEL4.3@217.34,73.947 217.34,73.822 217.098,73.58 R32_CHANNEL4.1@217.098,72.39 217.098,68.727 219.25,66.575 C17_CHANNEL4.2@221,66.575 221,66.7 221.45,67.15 221.875,67.15 223.225,68.5 C18_CHANNEL4.2@223.225,68.525 226.4,68.525 227.3,67.625 ; R33_CHANNEL4.2@227.275,64.8 227.261,64.815 227.261,66.533 U6_CHANNEL4.3@227.246,66.548 227.3,66.602 227.3,67.625 ; R27_CHANNEL4.2@230.167,68.187 227.862,68.187 227.3,67.625
  Top Layer w1: C26_CHANNEL1.2@41.274,77.343 41.274,73.951 44.175,71.05 52.7,71.05 ; P6.13@48.215,23.99 56.09,23.99 ; P6.10@52,16 56.09,16 ; P6.11@60.18,16 56.09,16 ; U11.1@69.85,38.225 69.859,38.216 69.859,36.866 C42.1@71.375,35.35 70.875,34.85 70.875,33.55 70.675,33.35 C41.2@70.55,33.35 70.55,32.038 ; C40.1@71.4,27.7 70.55,28.55 C39.2@70.55,30.725 70.55,32.038 ; P2.13@84.25,45.8 93.025,37.025 L1.1@106.46,37.025 106.56,36.925 106.56,35.89 107.675,34.775 135.402,34.775 135.988,35.361 135.988,35.555 136.187,35.753 VD8.1@136.25,35.753 ; Q2.3@92.1,41.5 v1(93.7,41.5) Q2.2@95.3,41.5 95.45,41.65 96.075,41.65 97.45,43.025 C6.2@97.45,43.5 ; v3(94.575,29.35) 94.6,29.35 S1.E@99.45,24.5 117.025,24.5 v3(123.075,30.55) ; C26_CHANNEL2.2@96.274,77.343 96.287,77.343 96.487,77.143 96.487,76.013 100.11,72.39 R32_CHANNEL2.1@108.098,72.39 ; C5.2@98.25,47.325 98.65,46.925 Q1.2@99.874,46.925 ; v1(98.764,45.465) 99.874,46.575 Q1.2@99.925,46.575 ; C10.1@100.325,42.975 C7.2@100.325,44.725 Q1.2@100.325,46.75 ; v1(108.585,59.436) v1(113.157,59.436) ; v1(136.275,40.65) 136.275,35.778 VD8.1@136.25,35.753 ; C26_CHANNEL3.2@150.274,77.343 150.399,77.343 150.599,77.143 150.599,76.201 153.775,73.025 161.463,73.025 R32_CHANNEL3.1@162.098,72.39 ; v3@155.725,40 C54.2@154.5,40 154.95,40.45 154.95,42.05 155.15,42.25 C53.2@155.275,42.25 160.5,42.25 C52.2@164,45.75 ; U15.1@156.15,37.5 156.15,36.15 154.5,34.5 147.4,34.5 C57.2@145.25,36.65 144.275,35.675 C58.2@138.825,35.675 138.786,35.714 136.289,35.714 VD8.1@136.25,35.753 ; U15.1@156.15,37.825 v3@156.15,39.575 ; U15.1@156.2,37.45 159.039,37.45 159.625,36.864 R50.1@159.625,36.75 ; VD6.1@174.75,52.409 175.139,52.02 175.139,51.011 175.8,50.35 177.55,50.35 177.75,50.15 C47.2@177.75,50.025 ; C26_CHANNEL4.2@205.274,77.343 205.274,73.951 208.175,71.05 216.7,71.05 ; 56.09,16 56.09,23.99 ; 56.09,23.99 P6.13@63.965,23.99 63.678,24.277 63.678,26.647 P6.8@60.535,29.79 62.782,32.038 v3(68.575,32.038) 70.55,32.038
  Bottom Layer w1: v1(36.4,59.225) 60.1,59.225 73.525,45.8 P2.13@84.25,45.8 ; C35.1@58,33.5 59,33.5 60.535,31.965 P6.8@60.535,29.79 61.5,28.825 61.5,26.5 60,25 C34.1@58.25,25 ; v3(68.575,32.038) 91.887,32.038 v3(94.575,29.35) ; v1(93.7,41.5) 93.7,47.9 ; v1(98.764,45.465) 96.329,47.9 93.7,47.9 ; v1(100.457,65.024) 100.457,64.918 105.939,59.436 v1(108.585,59.436) 108.585,57.86 105.45,54.725 94.125,54.725 v1(93.85,54.45) 93.7,54.3 93.7,47.9 ; v1(113.157,59.436) 120.493,52.1 130.275,52.1 136.275,46.1 v1(136.275,40.65) ; B1.2@123.025,34.775 123.075,34.725 v3(123.075,30.55) ; C46.2@176.5,41.25 178.55,41.25 ; C46.2@176.7,41.25 178.55,41.25 ; U12.4@200.42,36.93 200.42,49.08 195.25,54.25 C45.2@185.75,54.25 181.15,49.65 181.15,43.85 178.55,41.25
  other v1: 167.05,59.5 167.975,59.5 168.9,59.5 169.825,59.5 170.75,59.5 171.675,59.5 172.6,59.5 173.525,59.5 174.45,59.5 175.375,59.5 176.3,59.5
  other v2: 54.65,44.375 55.05,48 57.875,48.6
  other v3: 156.05,39.675 175.575,50.575
LCD_CS: P2.12 U1.42 | length 21.1
  Top Layer w0.3: P2.12@84.25,48.34 84.522,48.612 85.287,48.612 87.225,50.55 87.225,55.475 90.805,59.055 95.25,59.055 95.83,58.475 U1.42@97.75,58.475
LCD_DC: P2.10 U1.40 | length 17.7
  Top Layer w0.3: v2(86.106,57.404) 88.773,60.071 95.758,60.071 96.354,59.475 U1.40@97.75,59.475
  Bottom Layer w0.3: P2.10@84.25,53.42 86.106,55.276 v2(86.106,57.404)
LCD_LED: R16.1 U1.2 VT1.1 | length 31.5
  Top Layer w0.3: R16.1@79.275,54.375 79.238,54.337 79.238,50.862 83.025,47.075 89.62,47.075 93.326,50.781 98.406,50.781 99.75,52.125 U1.2@99.75,53.975
  Top Layer w0.5: VT1.1@79.15,56.25 79.213,56.187 79.213,54.437 R16.1@79.275,54.375
LCD_MOSI: P2.9 U1.41 | length 15.4
  Top Layer w0.3: P2.9@84.25,55.96 84.475,56.185 86.411,56.185 89.789,59.563 95.504,59.563 96.092,58.975 97.3,58.975 U1.41@97.75,58.975
  Bottom Layer w0.3: P2.9@84.25,55.96 P2.9@84.36,55.85
LCD_RESET: P2.11 U1.38 | length 20.7
  Top Layer w0.3: v2(92.202,61.468) 96.012,61.468 97.005,60.475 U1.38@97.75,60.475
  Bottom Layer w0.3: P2.11@84.25,50.88 85.68,50.88 88.138,53.338 88.138,57.404 v2(92.202,61.468)
LCD_SCK: P2.8 U1.39 | length 14.7
  Top Layer w0.3: P2.8@84.25,58.5 85.678,58.5 87.884,60.706 95.885,60.706 96.616,59.975 U1.39@97.75,59.975
LINK: R39.1 U10.53 | length 2
  Top Layer w0.3: R39.1@46.8,46.425 U10.53@48.775,46.425
NetC5_1: C5.1 Q1.1 U1.5 | length 7.3
  Top Layer w0.3: C5.1@98.25,48.825 98.25,48.83 98.745,49.325 Q1.1@100.25,49.325 100.25,49.425 101.25,50.425 U1.5@101.25,53.975
NetC6_1: C6.1 Q2.4 U1.4 | length 15.5
  Top Layer w0.3: C6.1@97.45,45.25 97.45,45.275 96.225,46.5 95.8,46.5 Q2.4@95.3,47 95,47 93.9,48.1 93.9,48.63 95.251,49.981 98.749,49.981 100.75,51.982 U1.4@100.75,53.975
NetC7_1: C7.1 Q1.3 U1.6 | length 10.7
  Top Layer w0.3: U1.6@101.75,53.975 101.75,52.175 103.6,50.325 103.6,48.275 102.25,46.925 Q1.3@102.25,46.825 102.025,46.6 C7.1@102.025,44.725
NetC9_1: C9.1 Q2.1 U1.3 | length 15.3
  Top Layer w0.3: C9.1@89.95,45.025 91.3,46.375 91.3,46.5 Q2.1@91.8,47 ; Q2.1@92.1,47 92.4,47 93.5,48.1 93.5,48.796 95.085,50.381 98.583,50.381 100.25,52.048 U1.3@100.25,53.975
NetC15_CHANNEL1_1: C15_CHANNEL1.1 R18_CHANNEL1.1 U4_CHANNEL1.7 | length 6.2
  Bottom Layer w0.5: R18_CHANNEL1.1@61.125,105 61.125,107.925 61.527,108.327 U4_CHANNEL1.7@64.25,108.327
NetC15_CHANNEL1_2: C15_CHANNEL1.2 R17_CHANNEL1.2 U3_CHANNEL1.3 U4_CHANNEL1.6 | length 22.2
  Top Layer w0.5: v1(66.225,101.575) 67.6,102.95 v1(67.6,111.2)
  Bottom Layer w0.5: U4_CHANNEL1.6@64.25,107.057 62.735,107.057 62.9,106.892 62.9,104.2 65.525,101.575 v1(66.225,101.575) U3_CHANNEL1.3@66.225,99.839 ; v1(67.6,111.2) 67.614,111.186 68.986,111.186 R17_CHANNEL1.2@69,111.172
NetC15_CHANNEL2_1: C15_CHANNEL2.1 R18_CHANNEL2.1 U4_CHANNEL2.7 | length 6.2
  Bottom Layer w0.5: R18_CHANNEL2.1@116.125,105 116.125,107.925 116.527,108.327 U4_CHANNEL2.7@119.25,108.327
NetC15_CHANNEL2_2: C15_CHANNEL2.2 R17_CHANNEL2.2 U3_CHANNEL2.3 U4_CHANNEL2.6 | length 22
  Top Layer w0.5: v1(121.225,101.575) 122.8,103.15 v1(122.8,111.175)
  Bottom Layer w0.5: U4_CHANNEL2.6@119.25,107.057 117.735,107.057 117.9,106.892 117.9,104.2 120.525,101.575 v1(121.225,101.575) U3_CHANNEL2.3@121.225,99.839 ; v1(122.8,111.175) 122.801,111.174 123.999,111.174 R17_CHANNEL2.2@124,111.172
NetC15_CHANNEL3_1: C15_CHANNEL3.1 R18_CHANNEL3.1 U4_CHANNEL3.7 | length 6.2
  Bottom Layer w0.5: R18_CHANNEL3.1@170.125,105 170.125,107.925 170.527,108.327 U4_CHANNEL3.7@173.25,108.327
NetC15_CHANNEL3_2: C15_CHANNEL3.2 R17_CHANNEL3.2 U3_CHANNEL3.3 U4_CHANNEL3.6 | length 22
  Top Layer w0.5: v1(175.225,101.575) 176.65,103 v1(176.65,110.05)
  Bottom Layer w0.5: U4_CHANNEL3.6@173.25,107.057 171.735,107.057 171.9,106.892 171.9,104.2 174.525,101.575 v1(175.225,101.575) U3_CHANNEL3.3@175.225,99.839 ; v1(176.65,110.05) 176.614,110.086 176.614,110.893 176.907,111.186 177.85,111.186 177.864,111.172 R17_CHANNEL3.2@178,111.172
NetC15_CHANNEL4_1: C15_CHANNEL4.1 R18_CHANNEL4.1 U4_CHANNEL4.7 | length 6.2
  Bottom Layer w0.5: R18_CHANNEL4.1@225.125,105 225.125,107.925 225.527,108.327 U4_CHANNEL4.7@228.25,108.327
NetC15_CHANNEL4_2: C15_CHANNEL4.2 R17_CHANNEL4.2 U3_CHANNEL4.3 U4_CHANNEL4.6 | length 22
  Top Layer w0.5: v1(230.225,101.575) 231.525,102.875 v1(231.525,110.125)
  Bottom Layer w0.5: U4_CHANNEL4.6@228.25,107.057 226.735,107.057 226.9,106.892 226.9,104.2 229.525,101.575 v1(230.225,101.575) U3_CHANNEL4.3@230.225,99.839 ; v1(231.525,110.125) 231.582,110.182 231.582,110.862 231.907,111.186 232.85,111.186 232.864,111.172 R17_CHANNEL4.2@233,111.172
NetC16_CHANNEL1_1: C16_CHANNEL1.1 P3_CHANNEL1.1 R19_CHANNEL1.2 R22_CHANNEL1.1 U4_CHANNEL1.5 U5_CHANNEL1.3 | length 38.9
  Top Layer w0.5: P3_CHANNEL1.1@43.025,113.42 43.17,113.275 44.825,113.275 45.275,112.825 45.275,110.825 46.425,109.675 v1(50.025,109.675) 58.775,109.675 v1(63.9,104.55)
  Bottom Layer w0.5: C16_CHANNEL1.1@49.5,105.325 49.5,106.528 50.022,107.05 U5_CHANNEL1.3@50.022,108.204 ; v1(50.025,109.675) 50.022,109.672 U5_CHANNEL1.3@50.022,108.204 ; R19_CHANNEL1.2@52.35,108.2 52.348,108.202 50.024,108.202 U5_CHANNEL1.3@50.022,108.204 ; U4_CHANNEL1.5@64.25,105.787 63.955,105.787 63.9,105.732 v1(63.9,104.55) 65.662,102.788 67.705,102.788 R22_CHANNEL1.1@67.83,102.663
NetC16_CHANNEL2_1: C16_CHANNEL2.1 P3_CHANNEL2.1 R19_CHANNEL2.2 R22_CHANNEL2.1 U4_CHANNEL2.5 U5_CHANNEL2.3 | length 38.9
  Top Layer w0.5: P3_CHANNEL2.1@98.025,113.42 98.17,113.275 99.825,113.275 100.275,112.825 100.275,110.825 101.425,109.675 v1(105.025,109.675) 113.775,109.675 v1(118.9,104.55)
  Bottom Layer w0.5: C16_CHANNEL2.1@104.5,105.325 104.5,106.528 105.022,107.05 U5_CHANNEL2.3@105.022,108.204 ; v1(105.025,109.675) 105.022,109.672 U5_CHANNEL2.3@105.022,108.204 ; R19_CHANNEL2.2@107.35,108.2 107.348,108.202 105.024,108.202 U5_CHANNEL2.3@105.022,108.204 ; U4_CHANNEL2.5@119.25,105.787 118.955,105.787 118.9,105.732 v1(118.9,104.55) 120.662,102.788 122.705,102.788 R22_CHANNEL2.1@122.83,102.663
NetC16_CHANNEL3_1: C16_CHANNEL3.1 P3_CHANNEL3.1 R19_CHANNEL3.2 R22_CHANNEL3.1 U4_CHANNEL3.5 U5_CHANNEL3.3 | length 38.9
  Top Layer w0.5: P3_CHANNEL3.1@152.025,113.42 152.17,113.275 153.825,113.275 154.275,112.825 154.275,110.825 155.425,109.675 v1(159.025,109.675) 167.775,109.675 v1(172.9,104.55)
  Bottom Layer w0.5: C16_CHANNEL3.1@158.5,105.325 158.5,106.528 159.022,107.05 U5_CHANNEL3.3@159.022,108.204 ; v1(159.025,109.675) 159.022,109.672 U5_CHANNEL3.3@159.022,108.204 ; R19_CHANNEL3.2@161.35,108.2 161.348,108.202 159.024,108.202 U5_CHANNEL3.3@159.022,108.204 ; U4_CHANNEL3.5@173.25,105.787 172.955,105.787 172.9,105.732 v1(172.9,104.55) 174.662,102.788 176.705,102.788 R22_CHANNEL3.1@176.83,102.663
NetC16_CHANNEL4_1: C16_CHANNEL4.1 P3_CHANNEL4.1 R19_CHANNEL4.2 R22_CHANNEL4.1 U4_CHANNEL4.5 U5_CHANNEL4.3 | length 38.9
  Top Layer w0.5: P3_CHANNEL4.1@207.025,113.42 207.17,113.275 208.825,113.275 209.275,112.825 209.275,110.825 210.425,109.675 v1(214.025,109.675) 222.775,109.675 v1(227.9,104.55)
  Bottom Layer w0.5: C16_CHANNEL4.1@213.5,105.325 213.5,106.528 214.022,107.05 U5_CHANNEL4.3@214.022,108.204 ; v1(214.025,109.675) 214.022,109.672 U5_CHANNEL4.3@214.022,108.204 ; R19_CHANNEL4.2@216.35,108.2 216.348,108.202 214.024,108.202 U5_CHANNEL4.3@214.022,108.204 ; U4_CHANNEL4.5@228.25,105.787 227.955,105.787 227.9,105.732 v1(227.9,104.55) 229.662,102.788 231.705,102.788 R22_CHANNEL4.1@231.83,102.663
NetC19_CHANNEL1_1: C19_CHANNEL1.1 R24_CHANNEL1.1 | length 3.2
  Top Layer w1: C19_CHANNEL1.1@59.666,77.597 R24_CHANNEL1.1@62.859,77.597
NetC19_CHANNEL1_2: C19_CHANNEL1.2 T1_CHANNEL1.10 VT3_CHANNEL1.2 | length 4
  Top Layer w1: VT3_CHANNEL1.2@52.705,77.597 C19_CHANNEL1.2@56.666,77.597
NetC19_CHANNEL2_1: C19_CHANNEL2.1 R24_CHANNEL2.1 | length 3.2
  Top Layer w1: C19_CHANNEL2.1@114.666,77.597 R24_CHANNEL2.1@117.859,77.597
NetC19_CHANNEL2_2: C19_CHANNEL2.2 T1_CHANNEL2.10 VT3_CHANNEL2.2 | length 4
  Top Layer w1: VT3_CHANNEL2.2@107.705,77.597 C19_CHANNEL2.2@111.666,77.597
NetC19_CHANNEL3_1: C19_CHANNEL3.1 R24_CHANNEL3.1 | length 3.2
  Top Layer w1: C19_CHANNEL3.1@168.666,77.597 R24_CHANNEL3.1@171.859,77.597
NetC19_CHANNEL3_2: C19_CHANNEL3.2 T1_CHANNEL3.10 VT3_CHANNEL3.2 | length 4
  Top Layer w1: VT3_CHANNEL3.2@161.705,77.597 C19_CHANNEL3.2@165.666,77.597
NetC19_CHANNEL4_1: C19_CHANNEL4.1 R24_CHANNEL4.1 | length 3.2
  Top Layer w1: C19_CHANNEL4.1@223.666,77.597 R24_CHANNEL4.1@226.859,77.597
NetC19_CHANNEL4_2: C19_CHANNEL4.2 T1_CHANNEL4.10 VT3_CHANNEL4.2 | length 4
  Top Layer w1: VT3_CHANNEL4.2@216.705,77.597 C19_CHANNEL4.2@220.666,77.597
NetC20_CHANNEL1_2: C20_CHANNEL1.2 C21_CHANNEL1.1 L2_CHANNEL1.2 U7_CHANNEL1.8 | length 8.3
  Top Layer w0.5: U7_CHANNEL1.8@26.686,109.347 27.042,109.347 28.441,107.948 28.478,107.948 C20_CHANNEL1.2@28.603,107.823 28.578,107.823 28.453,107.698 28.453,107.673 27.601,106.821 27.601,105.937 C21_CHANNEL1.1@27.328,105.664 27.583,105.409 L2_CHANNEL1.2@27.583,102.761
NetC20_CHANNEL2_2: C20_CHANNEL2.2 C21_CHANNEL2.1 L2_CHANNEL2.2 U7_CHANNEL2.8 | length 8.3
  Top Layer w0.5: U7_CHANNEL2.8@81.686,109.347 82.042,109.347 83.441,107.948 83.478,107.948 C20_CHANNEL2.2@83.603,107.823 83.578,107.823 83.453,107.698 83.453,107.673 82.601,106.821 82.601,105.937 C21_CHANNEL2.1@82.328,105.664 82.583,105.409 L2_CHANNEL2.2@82.583,102.761
NetC20_CHANNEL3_2: C20_CHANNEL3.2 C21_CHANNEL3.1 L2_CHANNEL3.2 U7_CHANNEL3.8 | length 8.3
  Top Layer w0.5: U7_CHANNEL3.8@135.686,109.347 136.042,109.347 137.441,107.948 137.478,107.948 C20_CHANNEL3.2@137.603,107.823 137.578,107.823 137.453,107.698 137.453,107.673 136.601,106.821 136.601,105.937 C21_CHANNEL3.1@136.328,105.664 136.583,105.409 L2_CHANNEL3.2@136.583,102.761
NetC20_CHANNEL4_2: C20_CHANNEL4.2 C21_CHANNEL4.1 L2_CHANNEL4.2 U7_CHANNEL4.8 | length 8.3
  Top Layer w0.5: U7_CHANNEL4.8@190.686,109.347 191.042,109.347 192.441,107.948 192.478,107.948 C20_CHANNEL4.2@192.603,107.823 192.578,107.823 192.453,107.698 192.453,107.673 191.601,106.821 191.601,105.937 C21_CHANNEL4.1@191.328,105.664 191.583,105.409 L2_CHANNEL4.2@191.583,102.761
NetC24_CHANNEL1_1: C24_CHANNEL1.1 C25_CHANNEL1.2 C28_CHANNEL1.2 C29_CHANNEL1.1 L2_CHANNEL1.4 L3_CHANNEL1.3 U8_CHANNEL1.5 | length 23.6
  Top Layer w0.5: C24_CHANNEL1.1@30.103,91.948 C24_CHANNEL1.1@30.128,91.948 ; L2_CHANNEL1.4@30.128,94.607 C24_CHANNEL1.1@30.128,91.948 ; C25_CHANNEL1.2@31.005,89.789 31.005,91.071 C24_CHANNEL1.1@30.128,91.948 ; C29_CHANNEL1.1@36.694,89.789 36.694,91.325 C28_CHANNEL1.2@37.317,91.948 ; L3_CHANNEL1.3@37.072,94.335 37.072,92.366 37.192,92.246 37.192,92.073 C28_CHANNEL1.2@37.317,91.948 ; C28_CHANNEL1.2@37.342,91.948 C28_CHANNEL1.2@37.317,91.948
  Top Layer w1: C25_CHANNEL1.2@31.005,89.789 C29_CHANNEL1.1@36.694,89.789 ; U8_CHANNEL1.5@33.655,81.915 33.655,89.709
NetC24_CHANNEL1_2: C24_CHANNEL1.2 C25_CHANNEL1.1 L2_CHANNEL1.3 U8_CHANNEL1.6 | length 14.5
  Top Layer w0.5: L2_CHANNEL1.3@27.583,94.361 27.747,94.197 27.747,92.804 28.453,92.098 28.453,92.073 C24_CHANNEL1.2@28.578,91.948 ; C25_CHANNEL1.1@27.955,89.789 27.955,91.325 C24_CHANNEL1.2@28.578,91.948 ; C24_CHANNEL1.2@28.603,91.948 C24_CHANNEL1.2@28.578,91.948
  Top Layer w1: C25_CHANNEL1.1@27.955,89.789 27.955,85.075 U8_CHANNEL1.6@31.115,81.915
NetC24_CHANNEL2_1: C24_CHANNEL2.1 C25_CHANNEL2.2 C28_CHANNEL2.2 C29_CHANNEL2.1 L2_CHANNEL2.4 L3_CHANNEL2.3 U8_CHANNEL2.5 | length 23.6
  Top Layer w0.5: C24_CHANNEL2.1@85.103,91.948 C24_CHANNEL2.1@85.128,91.948 ; L2_CHANNEL2.4@85.128,94.607 C24_CHANNEL2.1@85.128,91.948 ; C25_CHANNEL2.2@86.005,89.789 86.005,91.071 C24_CHANNEL2.1@85.128,91.948 ; C29_CHANNEL2.1@91.694,89.789 91.694,91.325 C28_CHANNEL2.2@92.317,91.948 ; L3_CHANNEL2.3@92.072,94.335 92.072,92.366 92.192,92.246 92.192,92.073 C28_CHANNEL2.2@92.317,91.948 ; C28_CHANNEL2.2@92.342,91.948 C28_CHANNEL2.2@92.317,91.948
  Top Layer w1: C25_CHANNEL2.2@86.005,89.789 C29_CHANNEL2.1@91.694,89.789 ; U8_CHANNEL2.5@88.655,81.915 88.655,89.709
NetC24_CHANNEL2_2: C24_CHANNEL2.2 C25_CHANNEL2.1 L2_CHANNEL2.3 U8_CHANNEL2.6 | length 14.5
  Top Layer w0.5: L2_CHANNEL2.3@82.583,94.361 82.747,94.197 82.747,92.804 83.453,92.098 83.453,92.073 C24_CHANNEL2.2@83.578,91.948 ; C25_CHANNEL2.1@82.955,89.789 82.955,91.325 C24_CHANNEL2.2@83.578,91.948 ; C24_CHANNEL2.2@83.603,91.948 C24_CHANNEL2.2@83.578,91.948
  Top Layer w1: C25_CHANNEL2.1@82.955,89.789 82.955,85.075 U8_CHANNEL2.6@86.115,81.915
NetC24_CHANNEL3_1: C24_CHANNEL3.1 C25_CHANNEL3.2 C28_CHANNEL3.2 C29_CHANNEL3.1 L2_CHANNEL3.4 L3_CHANNEL3.3 U8_CHANNEL3.5 | length 23.6
  Top Layer w0.5: C24_CHANNEL3.1@139.103,91.948 C24_CHANNEL3.1@139.128,91.948 ; L2_CHANNEL3.4@139.128,94.607 C24_CHANNEL3.1@139.128,91.948 ; C25_CHANNEL3.2@140.005,89.789 140.005,91.071 C24_CHANNEL3.1@139.128,91.948 ; C29_CHANNEL3.1@145.694,89.789 145.694,91.325 C28_CHANNEL3.2@146.317,91.948 ; L3_CHANNEL3.3@146.072,94.335 146.072,92.366 146.192,92.246 146.192,92.073 C28_CHANNEL3.2@146.317,91.948 ; C28_CHANNEL3.2@146.342,91.948 C28_CHANNEL3.2@146.317,91.948
  Top Layer w1: C25_CHANNEL3.2@140.005,89.789 C29_CHANNEL3.1@145.694,89.789 ; U8_CHANNEL3.5@142.655,81.915 142.655,89.709